# EAGLE board Master (EAGLE 8.2.2)
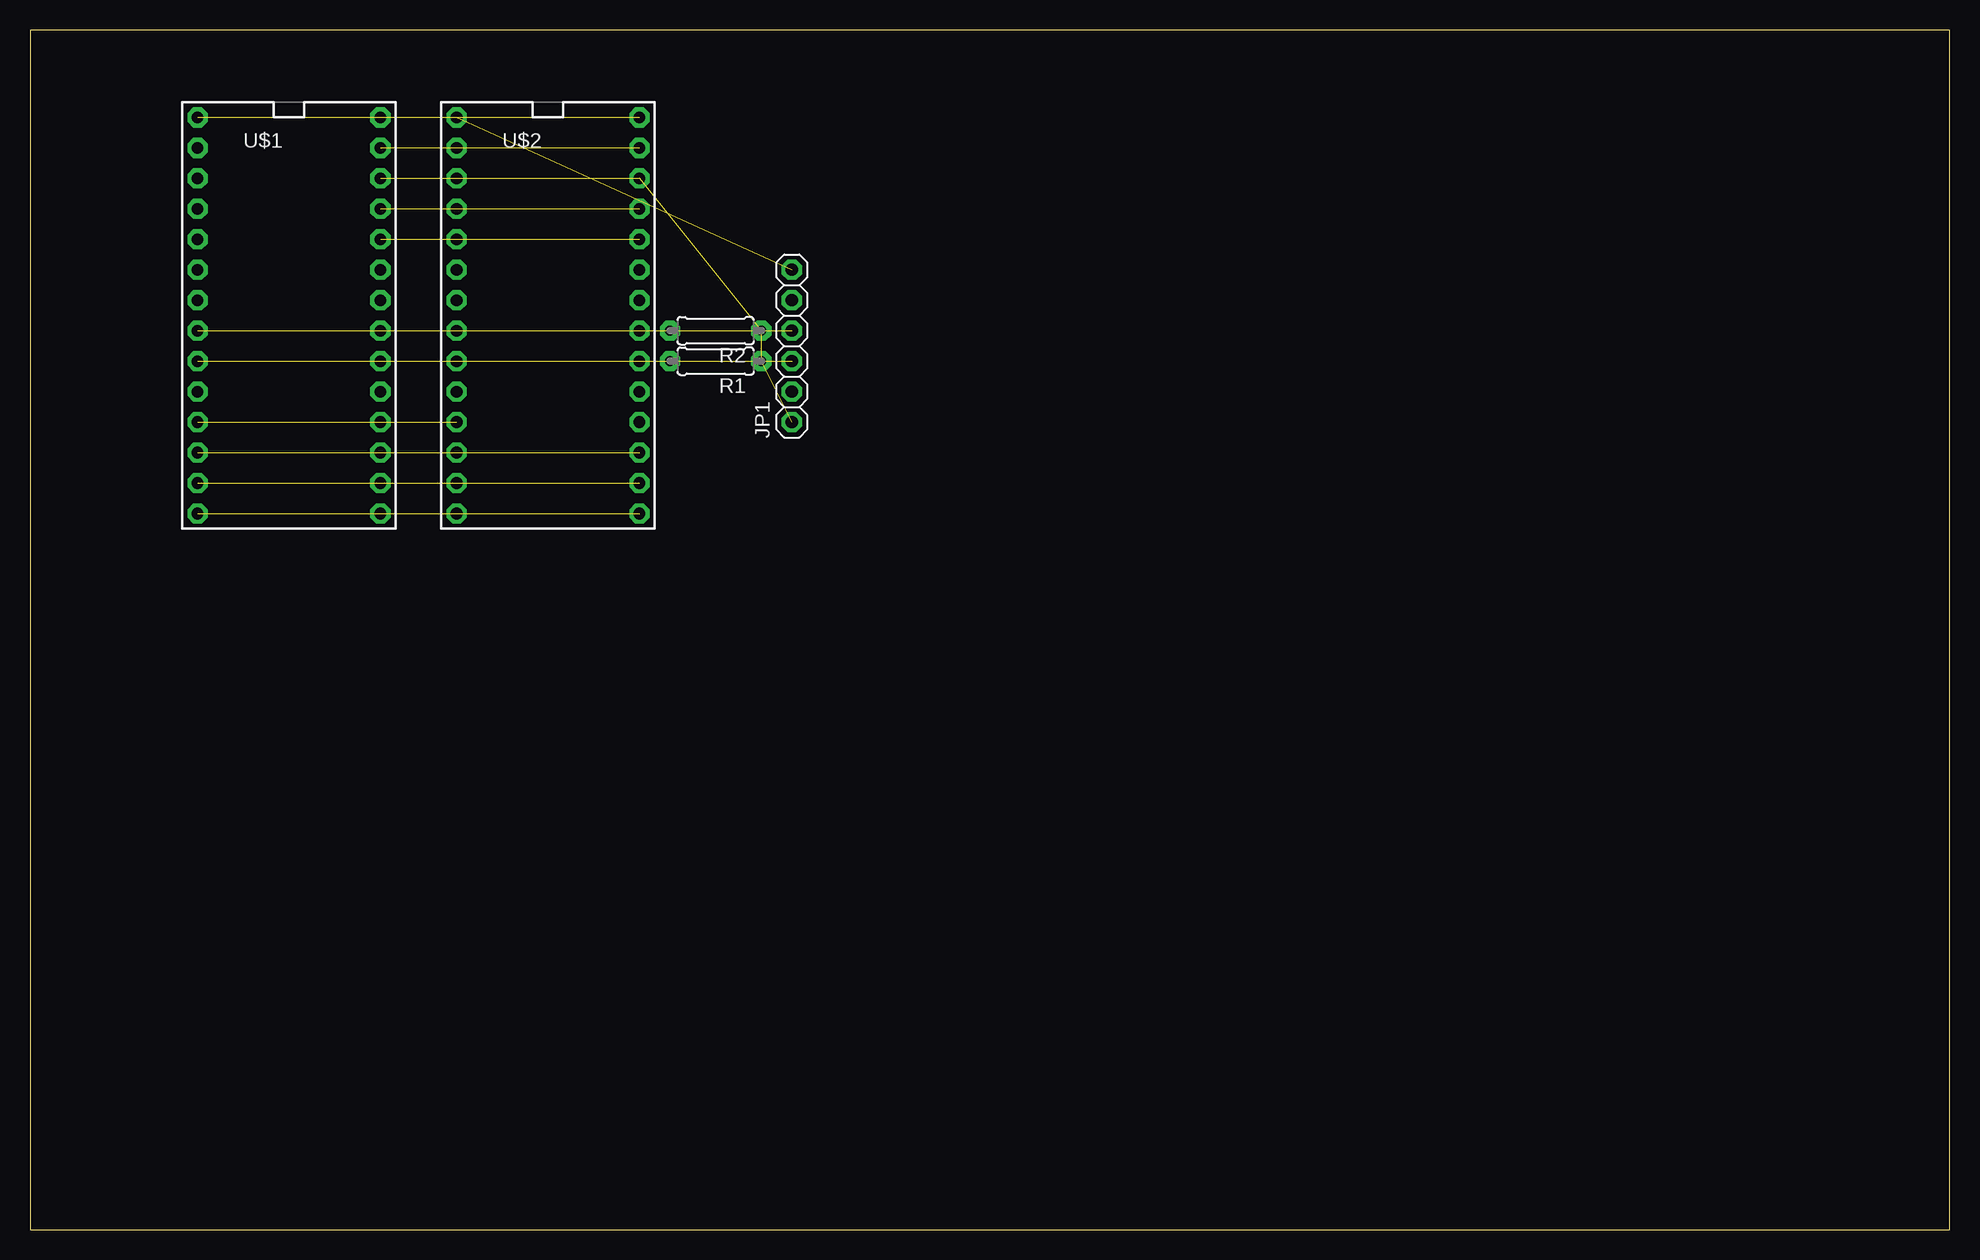
[diagram p0: board, top side]
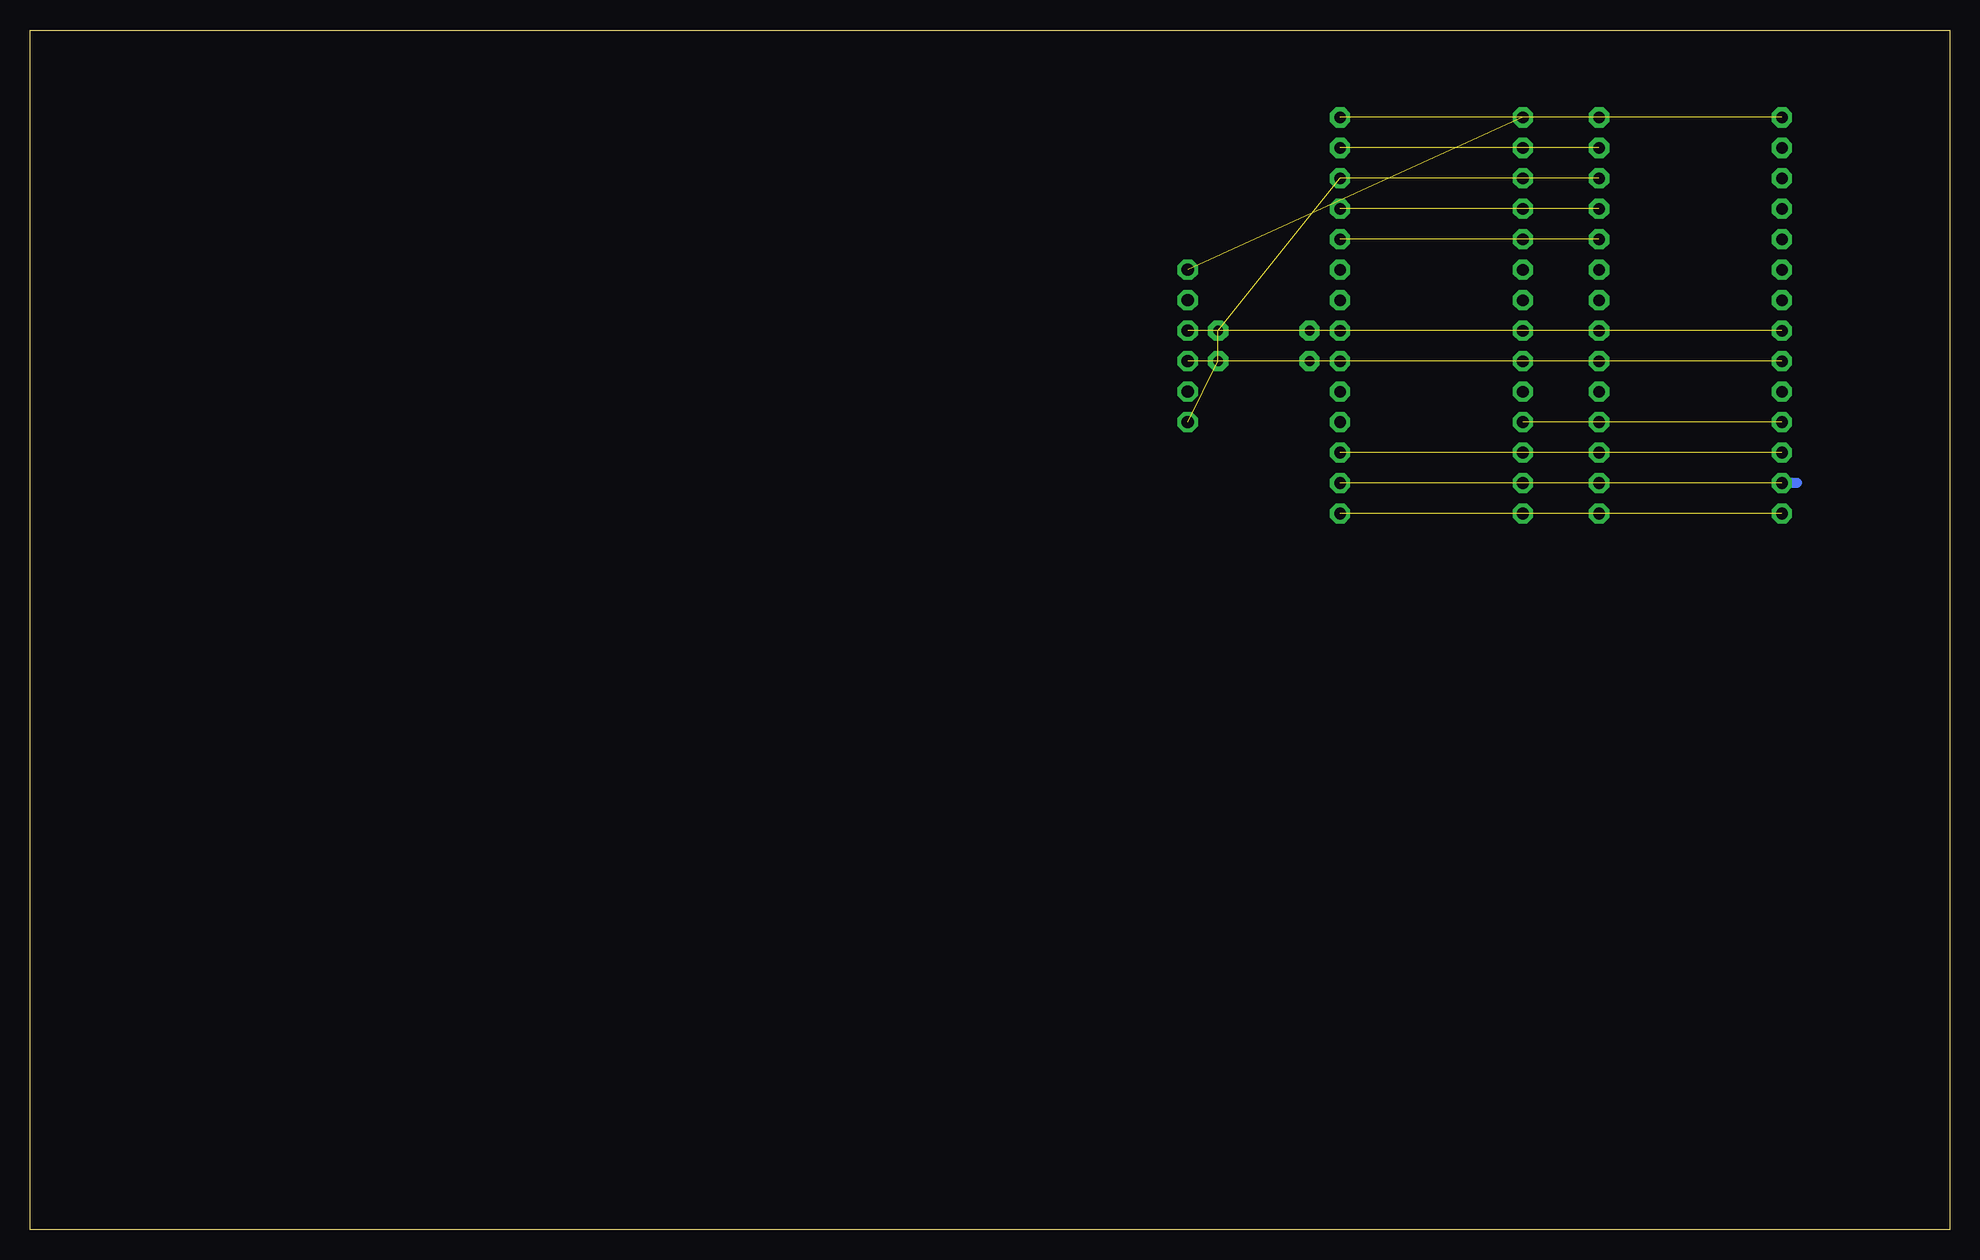
[diagram p1: board, bottom side, seen from below]

Size 160 x 100 mm. Coordinates in mm from the lower left corner, seen from the top.
Outline: 0,0 160,0 160,100 0,100 0,0
Copper layers (1*16): Top 0.035mm / dielectric 1.5mm / Bottom 0.035mm
Design rules "default": minimum track width 6mil, minimum drill 0.35mm, track to track 6mil, track to pad 6mil, pad to pad 6mil, via to via 6mil, smd to smd 6mil, copper to edge 40mil, drill to drill 6mil, minimum pad ring 10mil, minimum via ring 8mil, stop-mask expansion 4mil, vias tented up to drill 0mil, thermal gap 10mil

## Footprints (pad centres in the part's own frame; a part is rotated, then mirrored left to right if it is on the bottom)
1X06 = drill 1.016 pad 1.676 octagon: 1 -6.35,0; 2 -3.81,0; 3 -1.27,0; 4 1.27,0; 5 3.81,0; 6 6.35,0
0207/7 = drill 0.813 pad 1.676 octagon: 1 -3.81,0; 2 3.81,0
TEENSY_3.0-3.2&LC_DIL = drill 0.965 pad 1.676 octagon: 0 -7.62,13.97; 1 -7.62,11.43; 2 -7.62,8.89; 3 -7.62,6.35; 3.3V 7.62,11.43; 4 -7.62,3.81; 5 -7.62,1.27; 6 -7.62,-1.27; 7 -7.62,-3.81; 8 -7.62,-6.35; 9 -7.62,-8.89; 10 -7.62,-11.43; 11 -7.62,-13.97; 12 -7.62,-16.51; 13 7.62,-16.51; 14/A0 7.62,-13.97; 15/A1 7.62,-11.43; 16/A2 7.62,-8.89; 17/A3 7.62,-6.35; 18/A4 7.62,-3.81; 19/A5 7.62,-1.27; 20/A6 7.62,1.27; 21/A7 7.62,3.81; 22/A8 7.62,6.35; 23/A9 7.62,8.89; AGND 7.62,13.97; GND -7.62,16.51; VIN 7.62,16.51

## Placement (x,y rotation side)
JP1  [1X06]  63.5,73.66 90 top
R1  [0207/7]  57.15,72.39 180 top
R2  [0207/7]  57.15,74.93 180 top
U$1  TEENSY_3.1-3.2_DIL  [TEENSY_3.0-3.2&LC_DIL]  21.59,76.2 0 top
U$2  TEENSY_3.1-3.2_DIL  [TEENSY_3.0-3.2&LC_DIL]  43.18,76.2 0 top

## Library data of the parts
JP1 = pinhead
R1 R2 = rcl
U$1 U$2 = Teensy_3_and_LC_Series_Boards_v1.4

## Nets
AGND: U$1.AGND U$2.AGND
GND: JP1.6 U$1.GND U$2.GND
N$2: JP1.3 R1.2 U$1.18/A4 U$2.18/A4
N$3: JP1.4 R2.2 U$1.19/A5 U$2.19/A5
N$5: U$1.11 U$2.11
N$6: U$1.12 U$2.12
N$7: U$1.10 U$2.10
N$8: U$1.9 U$2.9
N$9: U$1.7 U$2.7
N$10: U$1.6 U$2.6
N$11: U$1.13 U$2.13
N$12: U$1.14/A0 U$2.14/A0
N$13: U$1.15/A1 U$2.15/A1
N$14: U$1.23/A9 U$2.23/A9
N$15: U$1.22/A8 U$2.22/A8
VCC: JP1.1 R1.1 R2.1 U$1.3.3V U$2.3.3V
VIN: U$1.VIN U$2.VIN

## Tracks (layer width: path | path; a pad name or v marks a point on that pad's centre or on a via)
AGND  (1 unrouted)
GND  (2 unrouted)
N$2  (3 unrouted)
N$3  (3 unrouted)
N$5  (1 unrouted)
  Bottom 0.813: 12.7,62.23 U$1.11
N$6  (1 unrouted)
N$7  (1 unrouted)
N$8  (1 unrouted)
N$9  (1 unrouted)
N$10  (1 unrouted)
N$11  (1 unrouted)
N$12  (1 unrouted)
N$13  (1 unrouted)
N$14  (1 unrouted)
N$15  (1 unrouted)
VCC  (4 unrouted)
VIN  (1 unrouted)